# Altium PCB PCB2.PcbDoc (part 2 of 7)
Units mm, origin at the board's own origin, x right, y up, seen from the top; angles counter-clockwise.
Board outline 49 x 45 mm, 6 copper layers (Component Side, GND1, 3.3V, 1.2V, GND2, Solder Side), stack 1.629 mm thick; 56 components, 116 nets, 925 pads, 478 vias.
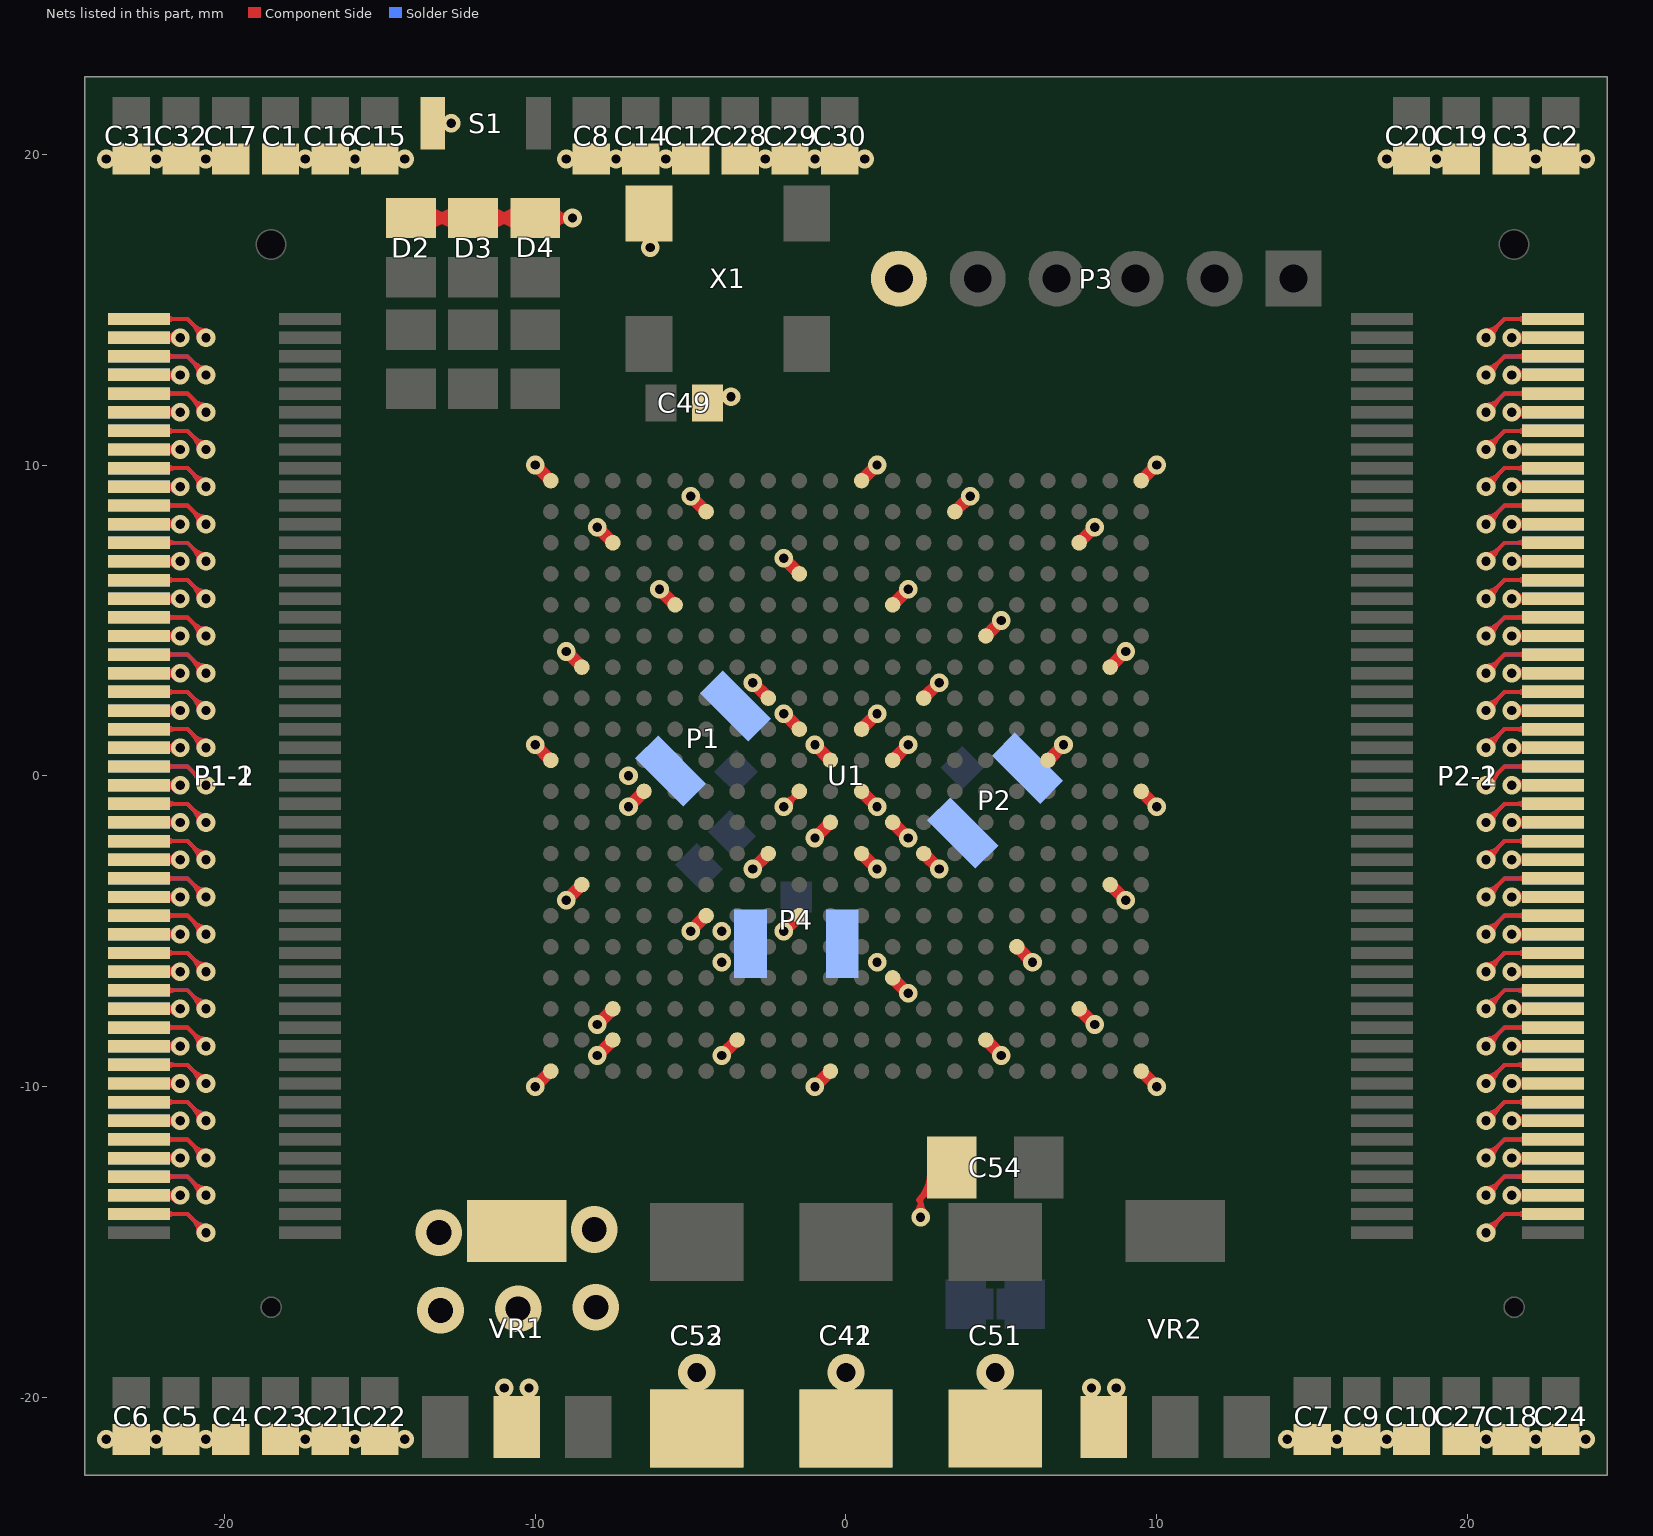
[diagram p6: the nets of this part, all layers, seen from the top]

## Via types
v1: diameter 0.6, hole 0.3, Component Side to Solder Side, tented both sides, 462 vias
v2: diameter 1.5, hole 0.8, Component Side to Solder Side, 10 vias
v3: diameter 1.2, hole 0.6, Component Side to Solder Side, 6 vias

## Nets (pads, with @x,y where several pads share a name; then routed paths per layer and width w, separated by ;. In a path a pad name is that pad's centre, name@x,y a point inside that pad or via, vN(x,y) a via of type N, cw(c..) or ccw(c..) an arc to the next point about the centre after c; other vN are vias at no path point) (continued)
GND: C1.1 C2.1 C3.1 C4.1 C5.1 C6.1 C7.1 C8.1 C9.1 C10.1 C12.1 C14.1 C15.1 C16.1 C17.1 C18.1 C19.1 C20.1 C21.1 C22.1 C23.1 C24.1 C27.1 C28.1 C29.1 C30.1 C31.1 C32.1 C41.2 C42.2 C49.1 C51.2 C52.2 C53.2 C54.2 D2.2 D3.2 D4.2 P1-1.1 P1-1.3 P1-1.5 P1-1.7 P1-1.9 P1-1.11 P1-1.13 P1-1.15 P1-1.17 P1-1.19 P1-1.21 P1-1.23 P1-1.25 P1-1.27 P1-1.29 P1-1.31 P1-1.33 P1-1.35 P1-1.37 P1-1.39 P1-1.41 P1-1.43 P1-1.45 P1-1.47 P1-1.49 P1-1.51 P1-1.53 P1-1.55 P1-1.57 P1-1.59 P1-1.61 P1-1.63 P1-1.65 P1-1.67 P1-1.69 P1-1.71 P1-1.73 P1-1.75 P1-1.77 P1-1.79 P1-1.81 P1-1.83 P1-1.85 P1-1.87 P1-1.89 P1-1.91 P1-1.93 P1-1.95 P1-1.97 P1-2.1 P1-2.3 P1-2.5 P1-2.7 P1-2.9 P1-2.11 P1-2.13 P1-2.15 P1-2.17 P1-2.19 P1-2.21 P1-2.23 P1-2.25 P1-2.27 P1-2.29 P1-2.31 P1-2.33 P1-2.35 P1-2.37 P1-2.39 P1-2.41 P1-2.43 P1-2.45 P1-2.47 P1-2.49 P1-2.51 P1-2.53 P1-2.55 P1-2.57 P1-2.59 P1-2.61 P1-2.63 P1-2.65 P1-2.67 P1-2.69 P1-2.71 P1-2.73 P1-2.75 P1-2.77 P1-2.79 P1-2.81 P1-2.83 P1-2.85 P1-2.87 P1-2.89 P1-2.91 P1-2.93 P1-2.95 P1-2.97 P1.2 P2-1.2 P2-1.4 P2-1.6 P2-1.8 P2-1.10 P2-1.12 P2-1.14 P2-1.16 P2-1.18 P2-1.20 P2-1.22 P2-1.24 P2-1.26 P2-1.28 P2-1.30 P2-1.32 P2-1.34 P2-1.36 P2-1.38 P2-1.40 P2-1.42 P2-1.44 P2-1.46 P2-1.48 P2-1.50 P2-1.52 P2-1.54 P2-1.56 P2-1.58 P2-1.60 P2-1.62 P2-1.64 P2-1.66 P2-1.68 P2-1.70 P2-1.72 P2-1.74 P2-1.76 P2-1.78 P2-1.80 P2-1.82 P2-1.84 P2-1.86 P2-1.88 P2-1.90 P2-1.92 P2-1.94 P2-1.96 P2-1.98 P2-2.2 P2-2.4 P2-2.6 P2-2.8 P2-2.10 P2-2.12 P2-2.14 P2-2.16 P2-2.18 P2-2.20 P2-2.22 P2-2.24 P2-2.26 P2-2.28 P2-2.30 P2-2.32 P2-2.34 P2-2.36 P2-2.38 P2-2.40 P2-2.42 P2-2.44 P2-2.46 P2-2.48 P2-2.50 P2-2.52 P2-2.54 P2-2.56 P2-2.58 P2-2.60 P2-2.62 P2-2.64 P2-2.66 P2-2.68 P2-2.70 P2-2.72 P2-2.74 P2-2.76 P2-2.78 P2-2.80 P2-2.82 P2-2.84 P2-2.86 P2-2.88 P2-2.90 P2-2.92 P2-2.94 P2-2.96 P2-2.98 P2.2 P3.6 P4.2 S1.1 U1.A1 U1.A11 U1.A20 U1.B6 U1.B14 U1.C3 U1.C18 U1.D9 U1.E5 U1.E12 U1.F15 U1.G2 U1.G19 U1.H8 U1.H13 U1.J9 U1.J11 U1.K1 U1.K10 U1.K12 U1.K17 U1.L4 U1.L9 U1.L11 U1.L20 U1.M10 U1.M12 U1.N8 U1.N11 U1.N13 U1.P2 U1.P19 U1.R6 U1.R9 U1.T16 U1.U12 U1.V3 U1.V18 U1.W3 U1.W7 U1.W15 U1.Y1 U1.Y10 U1.Y20 VR1.2 VR2.1 X1.2 | length 1056.3
  Component Side w0.127: P1-1.97@-22.75,-14.1 -21.196,-14.1 v1(-20.596,-14.7) ; P1-1.95@-22.75,-13.5 v1(-21.423,-13.5) v1@-21.323,-13.5 ; P1-1.93@-22.75,-12.9 -21.196,-12.9 v1(-20.596,-13.5) ; P1-1.91@-22.75,-12.3 v1(-21.423,-12.3) v1@-21.323,-12.3 ; P1-1.89@-22.75,-11.7 -21.196,-11.7 v1(-20.596,-12.3) ; P1-1.87@-22.75,-11.1 v1(-21.423,-11.1) v1@-21.323,-11.1 ; P1-1.85@-22.75,-10.5 -21.196,-10.5 v1(-20.596,-11.1) ; P1-1.83@-22.75,-9.9 v1(-21.423,-9.9) v1@-21.323,-9.9 ; P1-1.81@-22.75,-9.3 -21.196,-9.3 v1(-20.596,-9.9) ; P1-1.79@-22.75,-8.7 v1(-21.423,-8.7) v1@-21.323,-8.7 ; P1-1.77@-22.75,-8.1 -21.196,-8.1 v1(-20.596,-8.7) ; P1-1.75@-22.75,-7.5 v1(-21.423,-7.5) v1@-21.323,-7.5 ; P1-1.73@-22.75,-6.9 -21.196,-6.9 v1(-20.596,-7.5) ; P1-1.71@-22.75,-6.3 v1(-21.423,-6.3) v1@-21.323,-6.3 ; P1-1.69@-22.75,-5.7 -21.196,-5.7 v1(-20.596,-6.3) ; P1-1.67@-22.75,-5.1 v1(-21.423,-5.1) v1@-21.323,-5.1 ; P1-1.65@-22.75,-4.5 -21.196,-4.5 v1(-20.596,-5.1) ; P1-1.63@-22.75,-3.9 v1(-21.423,-3.9) v1@-21.323,-3.9 ; P1-1.61@-22.75,-3.3 -21.196,-3.3 v1(-20.596,-3.9) ; P1-1.59@-22.75,-2.7 v1(-21.423,-2.7) v1@-21.323,-2.7 ; P1-1.57@-22.75,-2.1 -21.196,-2.1 v1(-20.596,-2.7) ; P1-1.55@-22.75,-1.5 v1(-21.423,-1.5) v1@-21.323,-1.5 ; P1-1.53@-22.75,-0.9 -21.196,-0.9 v1(-20.596,-1.5) ; P1-1.51@-22.75,-0.3 v1(-21.423,-0.3) v1@-21.323,-0.3 ; P1-1.49@-22.75,0.3 -21.196,0.3 v1(-20.596,-0.3) ; P1-1.47@-22.75,0.9 v1(-21.423,0.9) v1@-21.323,0.9 ; P1-1.45@-22.75,1.5 -21.196,1.5 v1(-20.596,0.9) ; P1-1.43@-22.75,2.1 v1(-21.423,2.1) v1@-21.323,2.1 ; P1-1.41@-22.75,2.7 -21.196,2.7 v1(-20.596,2.1) ; P1-1.39@-22.75,3.3 v1(-21.423,3.3) v1@-21.323,3.3 ; P1-1.37@-22.75,3.9 -21.196,3.9 v1(-20.596,3.3) ; P1-1.35@-22.75,4.5 v1(-21.423,4.5) v1@-21.323,4.5 ; P1-1.33@-22.75,5.1 -21.196,5.1 v1(-20.596,4.5) ; P1-1.31@-22.75,5.7 v1(-21.423,5.7) v1@-21.323,5.7 ; P1-1.29@-22.75,6.3 -21.196,6.3 v1(-20.596,5.7) ; P1-1.27@-22.75,6.9 v1(-21.423,6.9) v1@-21.323,6.9 ; P1-1.25@-22.75,7.5 -21.196,7.5 v1(-20.596,6.9) ; P1-1.23@-22.75,8.1 v1(-21.423,8.1) v1@-21.323,8.1 ; P1-1.21@-22.75,8.7 -21.196,8.7 v1(-20.596,8.1) ; P1-1.19@-22.75,9.3 v1(-21.423,9.3) v1@-21.323,9.3 ; P1-1.17@-22.75,9.9 -21.196,9.9 v1(-20.596,9.3) ; P1-1.15@-22.75,10.5 v1(-21.423,10.5) v1@-21.323,10.5 ; P1-1.13@-22.75,11.1 -21.196,11.1 v1(-20.596,10.5) ; P1-1.11@-22.75,11.7 v1(-21.423,11.7) v1@-21.323,11.7 ; P1-1.9@-22.75,12.3 -21.196,12.3 v1(-20.596,11.7) ; P1-1.7@-22.75,12.9 v1(-21.423,12.9) v1@-21.323,12.9 ; P1-1.5@-22.75,13.5 -21.196,13.5 v1(-20.596,12.9) ; P1-1.3@-22.75,14.1 v1(-21.423,14.1) v1@-21.323,14.1 ; P1-1.1@-22.75,14.7 -21.196,14.7 v1(-20.596,14.1) ; v1(-2,-1) U1.L9@-1.5,-0.5 ; v1(20.596,-14.7) 21.196,-14.1 P2-1.98@22.75,-14.1 ; v1(20.596,-13.5) 21.196,-12.9 P2-1.94@22.75,-12.9 ; v1(20.596,-12.3) 21.196,-11.7 P2-1.90@22.75,-11.7 ; v1(20.596,-11.1) 21.196,-10.5 P2-1.86@22.75,-10.5 ; v1(20.596,-9.9) 21.196,-9.3 P2-1.82@22.75,-9.3 ; v1(20.596,-8.7) 21.196,-8.1 P2-1.78@22.75,-8.1 ; v1(20.596,-7.5) 21.196,-6.9 P2-1.74@22.75,-6.9 ; v1(20.596,-6.3) 21.196,-5.7 P2-1.70@22.75,-5.7 ; v1(20.596,-5.1) 21.196,-4.5 P2-1.66@22.75,-4.5 ; v1(20.596,-3.9) 21.196,-3.3 P2-1.62@22.75,-3.3 ; v1(20.596,-2.7) 21.196,-2.1 P2-1.58@22.75,-2.1 ; v1(20.596,-1.5) 21.196,-0.9 P2-1.54@22.75,-0.9 ; v1(20.596,-0.3) 21.196,0.3 P2-1.50@22.75,0.3 ; v1(20.596,0.9) 21.196,1.5 P2-1.46@22.75,1.5 ; v1(20.596,2.1) 21.196,2.7 P2-1.42@22.75,2.7 ; v1(20.596,3.3) 21.196,3.9 P2-1.38@22.75,3.9 ; v1(20.596,4.5) 21.196,5.1 P2-1.34@22.75,5.1 ; v1(20.596,5.7) 21.196,6.3 P2-1.30@22.75,6.3 ; v1(20.596,6.9) 21.196,7.5 P2-1.26@22.75,7.5 ; v1(20.596,8.1) 21.196,8.7 P2-1.22@22.75,8.7 ; v1(20.596,9.3) 21.196,9.9 P2-1.18@22.75,9.9 ; v1(20.596,10.5) 21.196,11.1 P2-1.14@22.75,11.1 ; v1(20.596,11.7) 21.196,12.3 P2-1.10@22.75,12.3 ; v1(20.596,12.9) 21.196,13.5 P2-1.6@22.75,13.5 ; v1(20.596,14.1) 21.196,14.7 P2-1.2@22.75,14.7 ; v1@21.323,-13.5 v1(21.423,-13.5) P2-1.96@22.75,-13.5 ; v1@21.323,-12.3 v1(21.423,-12.3) P2-1.92@22.75,-12.3 ; v1@21.323,-11.1 v1(21.423,-11.1) P2-1.88@22.75,-11.1 ; v1@21.323,-9.9 v1(21.423,-9.9) P2-1.84@22.75,-9.9 ; v1@21.323,-8.7 v1(21.423,-8.7) P2-1.80@22.75,-8.7 ; v1@21.323,-7.5 v1(21.423,-7.5) P2-1.76@22.75,-7.5 ; v1@21.323,-6.3 v1(21.423,-6.3) P2-1.72@22.75,-6.3 ; v1@21.323,-5.1 v1(21.423,-5.1) P2-1.68@22.75,-5.1 ; v1@21.323,-3.9 v1(21.423,-3.9) P2-1.64@22.75,-3.9 ; v1@21.323,-2.7 v1(21.423,-2.7) P2-1.60@22.75,-2.7 ; v1@21.323,-1.5 v1(21.423,-1.5) P2-1.56@22.75,-1.5 ; v1@21.323,-0.3 v1(21.423,-0.3) P2-1.52@22.75,-0.3 ; v1@21.323,0.9 v1(21.423,0.9) P2-1.48@22.75,0.9 ; v1@21.323,2.1 v1(21.423,2.1) P2-1.44@22.75,2.1 ; v1@21.323,3.3 v1(21.423,3.3) P2-1.40@22.75,3.3 ; v1@21.323,4.5 v1(21.423,4.5) P2-1.36@22.75,4.5 ; v1@21.323,5.7 v1(21.423,5.7) P2-1.32@22.75,5.7 ; v1@21.323,6.9 v1(21.423,6.9) P2-1.28@22.75,6.9 ; v1@21.323,8.1 v1(21.423,8.1) P2-1.24@22.75,8.1 ; v1@21.323,9.3 v1(21.423,9.3) P2-1.20@22.75,9.3 ; v1@21.323,10.5 v1(21.423,10.5) P2-1.16@22.75,10.5 ; v1@21.323,11.7 v1(21.423,11.7) P2-1.12@22.75,11.7 ; v1(21.423,12.9) P2-1.8@22.75,12.9 ; v1(21.423,14.1) P2-1.4@22.75,14.1 ; P1-1.95@-21.994,-13.5 ccw(c-21.994,-12.929) -21.59,-13.333 cw(c-21.994,-12.929) P1-1.95@-21.994,-13.5 ; P1-1.95@-21.994,-13.5 cw(c-21.994,-14.071) -21.59,-13.667 ccw(c-21.994,-14.071) P1-1.95@-21.994,-13.5 ; P1-1.91@-21.994,-12.3 ccw(c-21.994,-11.729) -21.59,-12.133 cw(c-21.994,-11.729) P1-1.91@-21.994,-12.3 ; P1-1.91@-21.994,-12.3 cw(c-21.994,-12.871) -21.59,-12.467 ccw(c-21.994,-12.871) P1-1.91@-21.994,-12.3 ; P1-1.87@-21.994,-11.1 ccw(c-21.994,-10.529) -21.59,-10.933 cw(c-21.994,-10.529) P1-1.87@-21.994,-11.1 ; P1-1.87@-21.994,-11.1 cw(c-21.994,-11.671) -21.59,-11.267 ccw(c-21.994,-11.671) P1-1.87@-21.994,-11.1 ; P1-1.83@-21.994,-9.9 ccw(c-21.994,-9.329) -21.59,-9.733 cw(c-21.994,-9.329) P1-1.83@-21.994,-9.9 ; P1-1.83@-21.994,-9.9 cw(c-21.994,-10.471) -21.59,-10.067 ccw(c-21.994,-10.471) P1-1.83@-21.994,-9.9 ; P1-1.79@-21.994,-8.7 ccw(c-21.994,-8.129) -21.59,-8.533 cw(c-21.994,-8.129) P1-1.79@-21.994,-8.7 ; P1-1.79@-21.994,-8.7 cw(c-21.994,-9.271) -21.59,-8.867 ccw(c-21.994,-9.271) P1-1.79@-21.994,-8.7 ; P1-1.75@-21.994,-7.5 ccw(c-21.994,-6.929) -21.59,-7.333 cw(c-21.994,-6.929) P1-1.75@-21.994,-7.5 ; P1-1.75@-21.994,-7.5 cw(c-21.994,-8.071) -21.59,-7.667 ccw(c-21.994,-8.071) P1-1.75@-21.994,-7.5 ; P1-1.71@-21.994,-6.3 ccw(c-21.994,-5.729) -21.59,-6.133 cw(c-21.994,-5.729) P1-1.71@-21.994,-6.3 ; P1-1.71@-21.994,-6.3 cw(c-21.994,-6.871) -21.59,-6.467 ccw(c-21.994,-6.871) P1-1.71@-21.994,-6.3 ; P1-1.67@-21.994,-5.1 ccw(c-21.994,-4.529) -21.59,-4.933 cw(c-21.994,-4.529) P1-1.67@-21.994,-5.1 ; P1-1.67@-21.994,-5.1 cw(c-21.994,-5.671) -21.59,-5.267 ccw(c-21.994,-5.671) P1-1.67@-21.994,-5.1 ; P1-1.63@-21.994,-3.9 ccw(c-21.994,-3.329) -21.59,-3.733 cw(c-21.994,-3.329) P1-1.63@-21.994,-3.9 ; P1-1.63@-21.994,-3.9 cw(c-21.994,-4.471) -21.59,-4.067 ccw(c-21.994,-4.471) P1-1.63@-21.994,-3.9 ; P1-1.59@-21.994,-2.7 ccw(c-21.994,-2.129) -21.59,-2.533 cw(c-21.994,-2.129) P1-1.59@-21.994,-2.7 ; P1-1.59@-21.994,-2.7 cw(c-21.994,-3.271) -21.59,-2.867 ccw(c-21.994,-3.271) P1-1.59@-21.994,-2.7 ; P1-1.55@-21.994,-1.5 ccw(c-21.994,-0.929) -21.59,-1.333 cw(c-21.994,-0.929) P1-1.55@-21.994,-1.5 ; P1-1.55@-21.994,-1.5 cw(c-21.994,-2.071) -21.59,-1.667 ccw(c-21.994,-2.071) P1-1.55@-21.994,-1.5 ; P1-1.51@-21.994,-0.3 ccw(c-21.994,0.271) -21.59,-0.133 cw(c-21.994,0.271) P1-1.51@-21.994,-0.3 ; P1-1.51@-21.994,-0.3 cw(c-21.994,-0.871) -21.59,-0.467 ccw(c-21.994,-0.871) P1-1.51@-21.994,-0.3 ; P1-1.47@-21.994,0.9 ccw(c-21.994,1.471) -21.59,1.067 cw(c-21.994,1.471) P1-1.47@-21.994,0.9 ; P1-1.47@-21.994,0.9 cw(c-21.994,0.329) -21.59,0.733 ccw(c-21.994,0.329) P1-1.47@-21.994,0.9 ; P1-1.43@-21.994,2.1 ccw(c-21.994,2.671) -21.59,2.267 cw(c-21.994,2.671) P1-1.43@-21.994,2.1 ; P1-1.43@-21.994,2.1 cw(c-21.994,1.529) -21.59,1.933 ccw(c-21.994,1.529) P1-1.43@-21.994,2.1 ; P1-1.39@-21.994,3.3 ccw(c-21.994,3.871) -21.59,3.467 cw(c-21.994,3.871) P1-1.39@-21.994,3.3 ; P1-1.39@-21.994,3.3 cw(c-21.994,2.729) -21.59,3.133 ccw(c-21.994,2.729) P1-1.39@-21.994,3.3 ; P1-1.35@-21.994,4.5 ccw(c-21.994,5.071) -21.59,4.667 cw(c-21.994,5.071) P1-1.35@-21.994,4.5 ; P1-1.35@-21.994,4.5 cw(c-21.994,3.929) -21.59,4.333 ccw(c-21.994,3.929) P1-1.35@-21.994,4.5 ; P1-1.31@-21.994,5.7 ccw(c-21.994,6.271) -21.59,5.867 cw(c-21.994,6.271) P1-1.31@-21.994,5.7 ; P1-1.31@-21.994,5.7 cw(c-21.994,5.129) -21.59,5.533 ccw(c-21.994,5.129) P1-1.31@-21.994,5.7 ; P1-1.27@-21.994,6.9 ccw(c-21.994,7.471) -21.59,7.067 cw(c-21.994,7.471) P1-1.27@-21.994,6.9 ; P1-1.27@-21.994,6.9 cw(c-21.994,6.329) -21.59,6.733 ccw(c-21.994,6.329) P1-1.27@-21.994,6.9 ; P1-1.23@-21.994,8.1 ccw(c-21.994,8.671) -21.59,8.267 cw(c-21.994,8.671) P1-1.23@-21.994,8.1 ; P1-1.23@-21.994,8.1 cw(c-21.994,7.529) -21.59,7.933 ccw(c-21.994,7.529) P1-1.23@-21.994,8.1 ; P1-1.19@-21.994,9.3 ccw(c-21.994,9.871) -21.59,9.467 cw(c-21.994,9.871) P1-1.19@-21.994,9.3 ; P1-1.19@-21.994,9.3 cw(c-21.994,8.729) -21.59,9.133 ccw(c-21.994,8.729) P1-1.19@-21.994,9.3 ; P1-1.15@-21.994,10.5 ccw(c-21.994,11.071) -21.59,10.667 cw(c-21.994,11.071) P1-1.15@-21.994,10.5 ; P1-1.15@-21.994,10.5 cw(c-21.994,9.929) -21.59,10.333 ccw(c-21.994,9.929) P1-1.15@-21.994,10.5 ; P1-1.11@-21.994,11.7 ccw(c-21.994,12.271) -21.59,11.867 cw(c-21.994,12.271) P1-1.11@-21.994,11.7 ; P1-1.11@-21.994,11.7 cw(c-21.994,11.129) -21.59,11.533 ccw(c-21.994,11.129) P1-1.11@-21.994,11.7 ; P1-1.7@-21.994,12.9 ccw(c-21.994,13.471) -21.59,13.067 cw(c-21.994,13.471) P1-1.7@-21.994,12.9 ; P1-1.7@-21.994,12.9 cw(c-21.994,12.329) -21.59,12.733 ccw(c-21.994,12.329) P1-1.7@-21.994,12.9 ; P1-1.3@-21.994,14.1 ccw(c-21.994,14.671) -21.59,14.267 cw(c-21.994,14.671) P1-1.3@-21.994,14.1 ; P1-1.3@-21.994,14.1 cw(c-21.994,13.529) -21.59,13.933 ccw(c-21.994,13.529) P1-1.3@-21.994,14.1 ; -21.62,-14.1 ccw(c-21.62,-14.43) -21.853,-14.197 cw(c-21.62,-14.43) -21.62,-14.1 ; -21.62,-14.1 cw(c-21.62,-13.77) -21.853,-14.003 ccw(c-21.62,-13.77) -21.62,-14.1 ; v1@-21.62,-13.5 ccw(c-21.62,-13.83) -21.853,-13.597 cw(c-21.62,-13.83) v1@-21.62,-13.5 ; v1@-21.62,-13.5 cw(c-21.62,-13.17) -21.853,-13.403 ccw(c-21.62,-13.17) v1@-21.62,-13.5 ; -21.62,-12.9 ccw(c-21.62,-13.23) -21.853,-12.997 cw(c-21.62,-13.23) -21.62,-12.9 ; -21.62,-12.9 cw(c-21.62,-12.57) -21.853,-12.803 ccw(c-21.62,-12.57) -21.62,-12.9 ; v1@-21.62,-12.3 ccw(c-21.62,-12.63) -21.853,-12.397 cw(c-21.62,-12.63) v1@-21.62,-12.3 ; v1@-21.62,-12.3 cw(c-21.62,-11.97) -21.853,-12.203 ccw(c-21.62,-11.97) v1@-21.62,-12.3 ; -21.62,-11.7 ccw(c-21.62,-12.03) -21.853,-11.797 cw(c-21.62,-12.03) -21.62,-11.7 ; -21.62,-11.7 cw(c-21.62,-11.37) -21.853,-11.603 ccw(c-21.62,-11.37) -21.62,-11.7 ; v1@-21.62,-11.1 ccw(c-21.62,-11.43) -21.853,-11.197 cw(c-21.62,-11.43) v1@-21.62,-11.1 ; v1@-21.62,-11.1 cw(c-21.62,-10.77) -21.853,-11.003 ccw(c-21.62,-10.77) v1@-21.62,-11.1 ; -21.62,-10.5 ccw(c-21.62,-10.83) -21.853,-10.597 cw(c-21.62,-10.83) -21.62,-10.5 ; -21.62,-10.5 cw(c-21.62,-10.17) -21.853,-10.403 ccw(c-21.62,-10.17) -21.62,-10.5 ; v1@-21.62,-9.9 ccw(c-21.62,-10.23) -21.853,-9.997 cw(c-21.62,-10.23) v1@-21.62,-9.9 ; v1@-21.62,-9.9 cw(c-21.62,-9.57) -21.853,-9.803 ccw(c-21.62,-9.57) v1@-21.62,-9.9 ; -21.62,-9.3 ccw(c-21.62,-9.63) -21.853,-9.397 cw(c-21.62,-9.63) -21.62,-9.3 ; -21.62,-9.3 cw(c-21.62,-8.97) -21.853,-9.203 ccw(c-21.62,-8.97) -21.62,-9.3 ; v1@-21.62,-8.7 ccw(c-21.62,-9.03) -21.853,-8.797 cw(c-21.62,-9.03) v1@-21.62,-8.7 ; v1@-21.62,-8.7 cw(c-21.62,-8.37) -21.853,-8.603 ccw(c-21.62,-8.37) v1@-21.62,-8.7 ; -21.62,-8.1 ccw(c-21.62,-8.43) -21.853,-8.197 cw(c-21.62,-8.43) -21.62,-8.1 ; -21.62,-8.1 cw(c-21.62,-7.77) -21.853,-8.003 ccw(c-21.62,-7.77) -21.62,-8.1 ; v1@-21.62,-7.5 ccw(c-21.62,-7.83) -21.853,-7.597 cw(c-21.62,-7.83) v1@-21.62,-7.5 ; v1@-21.62,-7.5 cw(c-21.62,-7.17) -21.853,-7.403 ccw(c-21.62,-7.17) v1@-21.62,-7.5 ; -21.62,-6.9 ccw(c-21.62,-7.23) -21.853,-6.997 cw(c-21.62,-7.23) -21.62,-6.9 ; -21.62,-6.9 cw(c-21.62,-6.57) -21.853,-6.803 ccw(c-21.62,-6.57) -21.62,-6.9 ; v1@-21.62,-6.3 ccw(c-21.62,-6.63) -21.853,-6.397 cw(c-21.62,-6.63) v1@-21.62,-6.3 ; v1@-21.62,-6.3 cw(c-21.62,-5.97) -21.853,-6.203 ccw(c-21.62,-5.97) v1@-21.62,-6.3 ; -21.62,-5.7 ccw(c-21.62,-6.03) -21.853,-5.797 cw(c-21.62,-6.03) -21.62,-5.7 ; -21.62,-5.7 cw(c-21.62,-5.37) -21.853,-5.603 ccw(c-21.62,-5.37) -21.62,-5.7 ; v1@-21.62,-5.1 ccw(c-21.62,-5.43) -21.853,-5.197 cw(c-21.62,-5.43) v1@-21.62,-5.1 ; v1@-21.62,-5.1 cw(c-21.62,-4.77) -21.853,-5.003 ccw(c-21.62,-4.77) v1@-21.62,-5.1 ; -21.62,-4.5 ccw(c-21.62,-4.83) -21.853,-4.597 cw(c-21.62,-4.83) -21.62,-4.5 ; -21.62,-4.5 cw(c-21.62,-4.17) -21.853,-4.403 ccw(c-21.62,-4.17) -21.62,-4.5 ; v1@-21.62,-3.9 ccw(c-21.62,-4.23) -21.853,-3.997 cw(c-21.62,-4.23) v1@-21.62,-3.9 ; v1@-21.62,-3.9 cw(c-21.62,-3.57) -21.853,-3.803 ccw(c-21.62,-3.57) v1@-21.62,-3.9 ; -21.62,-3.3 ccw(c-21.62,-3.63) -21.853,-3.397 cw(c-21.62,-3.63) -21.62,-3.3 ; -21.62,-3.3 cw(c-21.62,-2.97) -21.853,-3.203 ccw(c-21.62,-2.97) -21.62,-3.3 ; v1@-21.62,-2.7 ccw(c-21.62,-3.03) -21.853,-2.797 cw(c-21.62,-3.03) v1@-21.62,-2.7 ; v1@-21.62,-2.7 cw(c-21.62,-2.37) -21.853,-2.603 ccw(c-21.62,-2.37) v1@-21.62,-2.7 ; -21.62,-2.1 ccw(c-21.62,-2.43) -21.853,-2.197 cw(c-21.62,-2.43) -21.62,-2.1 ; -21.62,-2.1 cw(c-21.62,-1.77) -21.853,-2.003 ccw(c-21.62,-1.77) -21.62,-2.1 ; v1@-21.62,-1.5 ccw(c-21.62,-1.83) -21.853,-1.597 cw(c-21.62,-1.83) v1@-21.62,-1.5 ; v1@-21.62,-1.5 cw(c-21.62,-1.17) -21.853,-1.403 ccw(c-21.62,-1.17) v1@-21.62,-1.5 ; -21.62,-0.9 ccw(c-21.62,-1.23) -21.853,-0.997 cw(c-21.62,-1.23) -21.62,-0.9 ; -21.62,-0.9 cw(c-21.62,-0.57) -21.853,-0.803 ccw(c-21.62,-0.57) -21.62,-0.9 ; v1@-21.62,-0.3 ccw(c-21.62,-0.63) -21.853,-0.397 cw(c-21.62,-0.63) v1@-21.62,-0.3 ; v1@-21.62,-0.3 cw(c-21.62,0.03) -21.853,-0.203 ccw(c-21.62,0.03) v1@-21.62,-0.3 ; -21.62,0.3 ccw(c-21.62,-0.03) -21.853,0.203 cw(c-21.62,-0.03) -21.62,0.3 ; -21.62,0.3 cw(c-21.62,0.63) -21.853,0.397 ccw(c-21.62,0.63) -21.62,0.3 ; v1@-21.62,0.9 ccw(c-21.62,0.57) -21.853,0.803 cw(c-21.62,0.57) v1@-21.62,0.9 ; v1@-21.62,0.9 cw(c-21.62,1.23) -21.853,0.997 ccw(c-21.62,1.23) v1@-21.62,0.9 ; -21.62,1.5 ccw(c-21.62,1.17) -21.853,1.403 cw(c-21.62,1.17) -21.62,1.5 ; -21.62,1.5 cw(c-21.62,1.83) -21.853,1.597 ccw(c-21.62,1.83) -21.62,1.5 ; v1@-21.62,2.1 ccw(c-21.62,1.77) -21.853,2.003 cw(c-21.62,1.77) v1@-21.62,2.1 ; v1@-21.62,2.1 cw(c-21.62,2.43) -21.853,2.197 ccw(c-21.62,2.43) v1@-21.62,2.1 ; -21.62,2.7 ccw(c-21.62,2.37) -21.853,2.603 cw(c-21.62,2.37) -21.62,2.7 ; -21.62,2.7 cw(c-21.62,3.03) -21.853,2.797 ccw(c-21.62,3.03) -21.62,2.7 ; v1@-21.62,3.3 ccw(c-21.62,2.97) -21.853,3.203 cw(c-21.62,2.97) v1@-21.62,3.3 ; v1@-21.62,3.3 cw(c-21.62,3.63) -21.853,3.397 ccw(c-21.62,3.63) v1@-21.62,3.3 ; -21.62,3.9 ccw(c-21.62,3.57) -21.853,3.803 cw(c-21.62,3.57) -21.62,3.9 ; -21.62,3.9 cw(c-21.62,4.23) -21.853,3.997 ccw(c-21.62,4.23) -21.62,3.9 ; v1@-21.62,4.5 ccw(c-21.62,4.17) -21.853,4.403 cw(c-21.62,4.17) v1@-21.62,4.5 ; v1@-21.62,4.5 cw(c-21.62,4.83) -21.853,4.597 ccw(c-21.62,4.83) v1@-21.62,4.5 ; -21.62,5.1 ccw(c-21.62,4.77) -21.853,5.003 cw(c-21.62,4.77) -21.62,5.1 ; -21.62,5.1 cw(c-21.62,5.43) -21.853,5.197 ccw(c-21.62,5.43) -21.62,5.1 ; v1@-21.62,5.7 ccw(c-21.62,5.37) -21.853,5.603 cw(c-21.62,5.37) v1@-21.62,5.7 ; v1@-21.62,5.7 cw(c-21.62,6.03) -21.853,5.797 ccw(c-21.62,6.03) v1@-21.62,5.7 ; -21.62,6.3 ccw(c-21.62,5.97) -21.853,6.203 cw(c-21.62,5.97) -21.62,6.3 ; -21.62,6.3 cw(c-21.62,6.63) -21.853,6.397 ccw(c-21.62,6.63) -21.62,6.3 ; v1@-21.62,6.9 ccw(c-21.62,6.57) -21.853,6.803 cw(c-21.62,6.57) v1@-21.62,6.9 ; v1@-21.62,6.9 cw(c-21.62,7.23) -21.853,6.997 ccw(c-21.62,7.23) v1@-21.62,6.9 ; -21.62,7.5 ccw(c-21.62,7.17) -21.853,7.403 cw(c-21.62,7.17) -21.62,7.5 ; -21.62,7.5 cw(c-21.62,7.83) -21.853,7.597 ccw(c-21.62,7.83) -21.62,7.5 ; v1@-21.62,8.1 ccw(c-21.62,7.77) -21.853,8.003 cw(c-21.62,7.77) v1@-21.62,8.1 ; v1@-21.62,8.1 cw(c-21.62,8.43) -21.853,8.197 ccw(c-21.62,8.43) v1@-21.62,8.1 ; -21.62,8.7 ccw(c-21.62,8.37) -21.853,8.603 cw(c-21.62,8.37) -21.62,8.7 ; -21.62,8.7 cw(c-21.62,9.03) -21.853,8.797 ccw(c-21.62,9.03) -21.62,8.7 ; v1@-21.62,9.3 ccw(c-21.62,8.97) -21.853,9.203 cw(c-21.62,8.97) v1@-21.62,9.3 ; v1@-21.62,9.3 cw(c-21.62,9.63) -21.853,9.397 ccw(c-21.62,9.63) v1@-21.62,9.3 ; -21.62,9.9 ccw(c-21.62,9.57) -21.853,9.803 cw(c-21.62,9.57) -21.62,9.9 ; -21.62,9.9 cw(c-21.62,10.23) -21.853,9.997 ccw(c-21.62,10.23) -21.62,9.9 ; v1@-21.62,10.5 ccw(c-21.62,10.17) -21.853,10.403 cw(c-21.62,10.17) v1@-21.62,10.5 ; v1@-21.62,10.5 cw(c-21.62,10.83) -21.853,10.597 ccw(c-21.62,10.83) v1@-21.62,10.5 ; -21.62,11.1 ccw(c-21.62,10.77) -21.853,11.003 cw(c-21.62,10.77) -21.62,11.1 ; -21.62,11.1 cw(c-21.62,11.43) -21.853,11.197 ccw(c-21.62,11.43) -21.62,11.1 ; v1@-21.62,11.7 ccw(c-21.62,11.37) -21.853,11.603 cw(c-21.62,11.37) v1@-21.62,11.7 ; v1@-21.62,11.7 cw(c-21.62,12.03) -21.853,11.797 ccw(c-21.62,12.03) v1@-21.62,11.7 ; -21.62,12.3 ccw(c-21.62,11.97) -21.853,12.203 cw(c-21.62,11.97) -21.62,12.3 ; -21.62,12.3 cw(c-21.62,12.63) -21.853,12.397 ccw(c-21.62,12.63) -21.62,12.3 ; v1@-21.62,12.9 ccw(c-21.62,12.57) -21.853,12.803 cw(c-21.62,12.57) v1@-21.62,12.9 ; v1@-21.62,12.9 cw(c-21.62,13.23) -21.853,12.997 ccw(c-21.62,13.23) v1@-21.62,12.9 ; -21.62,13.5 ccw(c-21.62,13.17) -21.853,13.403 cw(c-21.62,13.17) -21.62,13.5 ; -21.62,13.5 cw(c-21.62,13.83) -21.853,13.597 ccw(c-21.62,13.83) -21.62,13.5 ; v1@-21.62,14.1 ccw(c-21.62,13.77) -21.853,14.003 cw(c-21.62,13.77) v1@-21.62,14.1 ; v1@-21.62,14.1 cw(c-21.62,14.43) -21.853,14.197 ccw(c-21.62,14.43) v1@-21.62,14.1 ; -21.62,14.7 ccw(c-21.62,14.37) -21.853,14.603 cw(c-21.62,14.37) -21.62,14.7 ; -21.62,14.7 cw(c-21.62,15.03) -21.853,14.797 ccw(c-21.62,15.03) -21.62,14.7 ; -21,-14.296 ccw(c-20.596,-13.893) -20.596,-14.464 cw(c-20.596,-13.893) -21,-14.296 ; -21,-14.296 cw(c-21.403,-14.7) -20.833,-14.7 ccw(c-21.403,-14.7) -21,-14.296 ; -21,-13.096 ccw(c-20.596,-12.693) -20.596,-13.264 cw(c-20.596,-12.693) -21,-13.096 ; -21,-13.096 cw(c-21.403,-13.5) -20.833,-13.5 ccw(c-21.403,-13.5) -21,-13.096 ; -21,-11.896 ccw(c-20.596,-11.493) -20.596,-12.064 cw(c-20.596,-11.493) -21,-11.896 ; -21,-11.896 cw(c-21.403,-12.3) -20.833,-12.3 ccw(c-21.403,-12.3) -21,-11.896 ; -21,-10.696 ccw(c-20.596,-10.293) -20.596,-10.864 cw(c-20.596,-10.293) -21,-10.696 ; -21,-10.696 cw(c-21.403,-11.1) -20.833,-11.1 ccw(c-21.403,-11.1) -21,-10.696 ; -21,-9.496 ccw(c-20.596,-9.093) -20.596,-9.664 cw(c-20.596,-9.093) -21,-9.496 ; -21,-9.496 cw(c-21.403,-9.9) -20.833,-9.9 ccw(c-21.403,-9.9) -21,-9.496 ; -21,-8.296 ccw(c-20.596,-7.893) -20.596,-8.464 cw(c-20.596,-7.893) -21,-8.296 ; -21,-8.296 cw(c-21.403,-8.7) -20.833,-8.7 ccw(c-21.403,-8.7) -21,-8.296 ; -21,-7.096 ccw(c-20.596,-6.693) -20.596,-7.264 cw(c-20.596,-6.693) -21,-7.096 ; -21,-7.096 cw(c-21.403,-7.5) -20.833,-7.5 ccw(c-21.403,-7.5) -21,-7.096 ; -21,-5.896 ccw(c-20.596,-5.493) -20.596,-6.064 cw(c-20.596,-5.493) -21,-5.896 ; -21,-5.896 cw(c-21.403,-6.3) -20.833,-6.3 ccw(c-21.403,-6.3) -21,-5.896 ; -21,-4.696 ccw(c-20.596,-4.293) -20.596,-4.864 cw(c-20.596,-4.293) -21,-4.696 ; -21,-4.696 cw(c-21.403,-5.1) -20.833,-5.1 ccw(c-21.403,-5.1) -21,-4.696 ; -21,-3.496 ccw(c-20.596,-3.093) -20.596,-3.664 cw(c-20.596,-3.093) -21,-3.496 ; -21,-3.496 cw(c-21.403,-3.9) -20.833,-3.9 ccw(c-21.403,-3.9) -21,-3.496 ; -21,-2.296 ccw(c-20.596,-1.893) -20.596,-2.464 cw(c-20.596,-1.893) -21,-2.296 ; -21,-2.296 cw(c-21.403,-2.7) -20.833,-2.7 ccw(c-21.403,-2.7) -21,-2.296 ; -21,-1.096 ccw(c-20.596,-0.693) -20.596,-1.264 cw(c-20.596,-0.693) -21,-1.096 ; -21,-1.096 cw(c-21.403,-1.5) -20.833,-1.5 ccw(c-21.403,-1.5) -21,-1.096 ; -21,0.104 ccw(c-20.596,0.507) -20.596,-0.064 cw(c-20.596,0.507) -21,0.104 ; -21,0.104 cw(c-21.403,-0.3) -20.833,-0.3 ccw(c-21.403,-0.3) -21,0.104 ; -21,1.304 ccw(c-20.596,1.707) -20.596,1.136 cw(c-20.596,1.707) -21,1.304 ; -21,1.304 cw(c-21.403,0.9) -20.833,0.9 ccw(c-21.403,0.9) -21,1.304 ; -21,2.504 ccw(c-20.596,2.907) -20.596,2.336 cw(c-20.596,2.907) -21,2.504 ; -21,2.504 cw(c-21.403,2.1) -20.833,2.1 ccw(c-21.403,2.1) -21,2.504 ; -21,3.704 ccw(c-20.596,4.107) -20.596,3.536 cw(c-20.596,4.107) -21,3.704 ; -21,3.704 cw(c-21.403,3.3) -20.833,3.3 ccw(c-21.403,3.3) -21,3.704 ; -21,4.904 ccw(c-20.596,5.307) -20.596,4.736 cw(c-20.596,5.307) -21,4.904 ; -21,4.904 cw(c-21.403,4.5) -20.833,4.5 ccw(c-21.403,4.5) -21,4.904 ; -21,6.104 ccw(c-20.596,6.507) -20.596,5.936 cw(c-20.596,6.507) -21,6.104 ; -21,6.104 cw(c-21.403,5.7) -20.833,5.7 ccw(c-21.403,5.7) -21,6.104 ; -21,7.304 ccw(c-20.596,7.707) -20.596,7.136 cw(c-20.596,7.707) -21,7.304 ; -21,7.304 cw(c-21.403,6.9) -20.833,6.9 ccw(c-21.403,6.9) -21,7.304 ; -21,8.504 ccw(c-20.596,8.907) -20.596,8.336 cw(c-20.596,8.907) -21,8.504 ; -21,8.504 cw(c-21.403,8.1) -20.833,8.1 ccw(c-21.403,8.1) -21,8.504 ; -21,9.704 ccw(c-20.596,10.107) -20.596,9.536 cw(c-20.596,10.107) -21,9.704 ; -21,9.704 cw(c-21.403,9.3) -20.833,9.3 ccw(c-21.403,9.3) -21,9.704 ; -21,10.904 ccw(c-20.596,11.307) -20.596,10.736 cw(c-20.596,11.307) -21,10.904 ; -21,10.904 cw(c-21.403,10.5) -20.833,10.5 ccw(c-21.403,10.5) -21,10.904 ; -21,12.104 ccw(c-20.596,12.507) -20.596,11.936 cw(c-20.596,12.507) -21,12.104 ; -21,12.104 cw(c-21.403,11.7) -20.833,11.7 ccw(c-21.403,11.7) -21,12.104 ; -21,13.304 ccw(c-20.596,13.707) -20.596,13.136 cw(c-20.596,13.707) -21,13.304 ; -21,13.304 cw(c-21.403,12.9) -20.833,12.9 ccw(c-21.403,12.9) -21,13.304 ; -21,14.504 ccw(c-20.596,14.907) -20.596,14.336 cw(c-20.596,14.907) -21,14.504 ; -21,14.504 cw(c-21.403,14.1) -20.833,14.1 ccw(c-21.403,14.1) -21,14.504 ; v1@-1.818,-0.818 ccw(c-2.137,-0.5) -1.687,-0.5 cw(c-2.137,-0.5) v1@-1.818,-0.818 ; v1@-1.818,-0.818 cw(c-1.5,-1.137) -1.5,-0.686 ccw(c-1.5,-1.137) v1@-1.818,-0.818 ; U1.L9@-1.596,-0.596 ccw(c-1.193,-1) -1.764,-1 cw(c-1.193,-1) U1.L9@-1.596,-0.596 ; U1.L9@-1.596,-0.596 cw(c-2,-0.193) -2,-0.764 ccw(c-2,-0.193) U1.L9@-1.596,-0.596 ; 21,-14.296 ccw(c21.403,-14.7) 20.833,-14.7 cw(c21.403,-14.7) 21,-14.296 ; 21,-14.296 cw(c20.596,-13.893) 20.596,-14.464 ccw(c20.596,-13.893) 21,-14.296 ; 21,-13.096 ccw(c21.403,-13.5) 20.833,-13.5 cw(c21.403,-13.5) 21,-13.096 ; 21,-13.096 cw(c20.596,-12.693) 20.596,-13.264 ccw(c20.596,-12.693) 21,-13.096 ; 21,-11.896 ccw(c21.403,-12.3) 20.833,-12.3 cw(c21.403,-12.3) 21,-11.896 ; 21,-11.896 cw(c20.596,-11.493) 20.596,-12.064 ccw(c20.596,-11.493) 21,-11.896 ; 21,-10.696 ccw(c21.403,-11.1) 20.833,-11.1 cw(c21.403,-11.1) 21,-10.696 ; 21,-10.696 cw(c20.596,-10.293) 20.596,-10.864 ccw(c20.596,-10.293) 21,-10.696 ; 21,-9.496 ccw(c21.403,-9.9) 20.833,-9.9 cw(c21.403,-9.9) 21,-9.496 ; 21,-9.496 cw(c20.596,-9.093) 20.596,-9.664 ccw(c20.596,-9.093) 21,-9.496 ; 21,-8.296 ccw(c21.403,-8.7) 20.833,-8.7 cw(c21.403,-8.7) 21,-8.296 ; 21,-8.296 cw(c20.596,-7.893) 20.596,-8.464 ccw(c20.596,-7.893) 21,-8.296 ; 21,-7.096 ccw(c21.403,-7.5) 20.833,-7.5 cw(c21.403,-7.5) 21,-7.096 ; 21,-7.096 cw(c20.596,-6.693) 20.596,-7.264 ccw(c20.596,-6.693) 21,-7.096 ; 21,-5.896 ccw(c21.403,-6.3) 20.833,-6.3 cw(c21.403,-6.3) 21,-5.896 ; 21,-5.896 cw(c20.596,-5.493) 20.596,-6.064 ccw(c20.596,-5.493) 21,-5.896 ; 21,-4.696 ccw(c21.403,-5.1) 20.833,-5.1 cw(c21.403,-5.1) 21,-4.696 ; 21,-4.696 cw(c20.596,-4.293) 20.596,-4.864 ccw(c20.596,-4.293) 21,-4.696 ; 21,-3.496 ccw(c21.403,-3.9) 20.833,-3.9 cw(c21.403,-3.9) 21,-3.496 ; 21,-3.496 cw(c20.596,-3.093) 20.596,-3.664 ccw(c20.596,-3.093) 21,-3.496 ; 21,-2.296 ccw(c21.403,-2.7) 20.833,-2.7 cw(c21.403,-2.7) 21,-2.296 ; 21,-2.296 cw(c20.596,-1.893) 20.596,-2.464 ccw(c20.596,-1.893) 21,-2.296 ; 21,-1.096 ccw(c21.403,-1.5) 20.833,-1.5 cw(c21.403,-1.5) 21,-1.096 ; 21,-1.096 cw(c20.596,-0.693) 20.596,-1.264 ccw(c20.596,-0.693) 21,-1.096 ; 21,0.104 ccw(c21.403,-0.3) 20.833,-0.3 cw(c21.403,-0.3) 21,0.104 ; 21,0.104 cw(c20.596,0.507) 20.596,-0.064 ccw(c20.596,0.507) 21,0.104 ; 21,1.304 ccw(c21.403,0.9) 20.833,0.9 cw(c21.403,0.9) 21,1.304 ; 21,1.304 cw(c20.596,1.707) 20.596,1.136 ccw(c20.596,1.707) 21,1.304 ; 21,2.504 ccw(c21.403,2.1) 20.833,2.1 cw(c21.403,2.1) 21,2.504 ; 21,2.504 cw(c20.596,2.907) 20.596,2.336 ccw(c20.596,2.907) 21,2.504 ; 21,3.704 ccw(c21.403,3.3) 20.833,3.3 cw(c21.403,3.3) 21,3.704 ; 21,3.704 cw(c20.596,4.107) 20.596,3.536 ccw(c20.596,4.107) 21,3.704 ; 21,4.904 ccw(c21.403,4.5) 20.833,4.5 cw(c21.403,4.5) 21,4.904 ; 21,4.904 cw(c20.596,5.307) 20.596,4.736 ccw(c20.596,5.307) 21,4.904 ; 21,6.104 ccw(c21.403,5.7) 20.833,5.7 cw(c21.403,5.7) 21,6.104 ; 21,6.104 cw(c20.596,6.507) 20.596,5.936 ccw(c20.596,6.507) 21,6.104 ; 21,7.304 ccw(c21.403,6.9) 20.833,6.9 cw(c21.403,6.9) 21,7.304 ; 21,7.304 cw(c20.596,7.707) 20.596,7.136 ccw(c20.596,7.707) 21,7.304 ; 21,8.504 ccw(c21.403,8.1) 20.833,8.1 cw(c21.403,8.1) 21,8.504 ; 21,8.504 cw(c20.596,8.907) 20.596,8.336 ccw(c20.596,8.907) 21,8.504 ; 21,9.704 ccw(c21.403,9.3) 20.833,9.3 cw(c21.403,9.3) 21,9.704 ; 21,9.704 cw(c20.596,10.107) 20.596,9.536 ccw(c20.596,10.107) 21,9.704 ; 21,10.904 ccw(c21.403,10.5) 20.833,10.5 cw(c21.403,10.5) 21,10.904 ; 21,10.904 cw(c20.596,11.307) 20.596,10.736 ccw(c20.596,11.307) 21,10.904 ; 21,12.104 ccw(c21.403,11.7) 20.833,11.7 cw(c21.403,11.7) 21,12.104 ; 21,12.104 cw(c20.596,12.507) 20.596,11.936 ccw(c20.596,12.507) 21,12.104 ; 21,13.304 ccw(c21.403,12.9) 20.833,12.9 cw(c21.403,12.9) 21,13.304 ; 21,13.304 cw(c20.596,13.707) 20.596,13.136 ccw(c20.596,13.707) 21,13.304 ; 21,14.504 ccw(c21.403,14.1) 20.833,14.1 cw(c21.403,14.1) 21,14.504 ; 21,14.504 cw(c20.596,14.907) 20.596,14.336 ccw(c20.596,14.907) 21,14.504 ; 21.62,-14.1 ccw(c21.62,-13.77) 21.853,-14.003 cw(c21.62,-13.77) 21.62,-14.1 ; 21.62,-14.1 cw(c21.62,-14.43) 21.853,-14.197 ccw(c21.62,-14.43) 21.62,-14.1 ; v1@21.62,-13.5 ccw(c21.62,-13.17) 21.853,-13.403 cw(c21.62,-13.17) v1@21.62,-13.5 ; v1@21.62,-13.5 cw(c21.62,-13.83) 21.853,-13.597 ccw(c21.62,-13.83) v1@21.62,-13.5 ; 21.62,-12.9 ccw(c21.62,-12.57) 21.853,-12.803 cw(c21.62,-12.57) 21.62,-12.9 ; 21.62,-12.9 cw(c21.62,-13.23) 21.853,-12.997 ccw(c21.62,-13.23) 21.62,-12.9 ; v1@21.62,-12.3 ccw(c21.62,-11.97) 21.853,-12.203 cw(c21.62,-11.97) v1@21.62,-12.3 ; v1@21.62,-12.3 cw(c21.62,-12.63) 21.853,-12.397 ccw(c21.62,-12.63) v1@21.62,-12.3 ; 21.62,-11.7 ccw(c21.62,-11.37) 21.853,-11.603 cw(c21.62,-11.37) 21.62,-11.7 ; 21.62,-11.7 cw(c21.62,-12.03) 21.853,-11.797 ccw(c21.62,-12.03) 21.62,-11.7 ; v1@21.62,-11.1 ccw(c21.62,-10.77) 21.853,-11.003 cw(c21.62,-10.77) v1@21.62,-11.1 ; v1@21.62,-11.1 cw(c21.62,-11.43) 21.853,-11.197 ccw(c21.62,-11.43) v1@21.62,-11.1 ; 21.62,-10.5 ccw(c21.62,-10.17) 21.853,-10.403 cw(c21.62,-10.17) 21.62,-10.5 ; 21.62,-10.5 cw(c21.62,-10.83) 21.853,-10.597 ccw(c21.62,-10.83) 21.62,-10.5 ; v1@21.62,-9.9 ccw(c21.62,-9.57) 21.853,-9.803 cw(c21.62,-9.57) v1@21.62,-9.9 ; v1@21.62,-9.9 cw(c21.62,-10.23) 21.853,-9.997 ccw(c21.62,-10.23) v1@21.62,-9.9 ; 21.62,-9.3 ccw(c21.62,-8.97) 21.853,-9.203 cw(c21.62,-8.97) 21.62,-9.3 ; 21.62,-9.3 cw(c21.62,-9.63) 21.853,-9.397 ccw(c21.62,-9.63) 21.62,-9.3 ; v1@21.62,-8.7 ccw(c21.62,-8.37) 21.853,-8.603 cw(c21.62,-8.37) v1@21.62,-8.7 ; v1@21.62,-8.7 cw(c21.62,-9.03) 21.853,-8.797 ccw(c21.62,-9.03) v1@21.62,-8.7 ; 21.62,-8.1 ccw(c21.62,-7.77) 21.853,-8.003 cw(c21.62,-7.77) 21.62,-8.1 ; 21.62,-8.1 cw(c21.62,-8.43) 21.853,-8.197 ccw(c21.62,-8.43) 21.62,-8.1 ; v1@21.62,-7.5 ccw(c21.62,-7.17) 21.853,-7.403 cw(c21.62,-7.17) v1@21.62,-7.5 ; v1@21.62,-7.5 cw(c21.62,-7.83) 21.853,-7.597 ccw(c21.62,-7.83) v1@21.62,-7.5 ; 21.62,-6.9 ccw(c21.62,-6.57) 21.853,-6.803 cw(c21.62,-6.57) 21.62,-6.9 ; 21.62,-6.9 cw(c21.62,-7.23) 21.853,-6.997 ccw(c21.62,-7.23) 21.62,-6.9 ; v1@21.62,-6.3 ccw(c21.62,-5.97) 21.853,-6.203 cw(c21.62,-5.97) v1@21.62,-6.3 ; v1@21.62,-6.3 cw(c21.62,-6.63) 21.853,-6.397 ccw(c21.62,-6.63) v1@21.62,-6.3 ; 21.62,-5.7 ccw(c21.62,-5.37) 21.853,-5.603 cw(c21.62,-5.37) 21.62,-5.7 ; 21.62,-5.7 cw(c21.62,-6.03) 21.853,-5.797 ccw(c21.62,-6.03) 21.62,-5.7 ; v1@21.62,-5.1 ccw(c21.62,-4.77) 21.853,-5.003 cw(c21.62,-4.77) v1@21.62,-5.1 ; v1@21.62,-5.1 cw(c21.62,-5.43) 21.853,-5.197 ccw(c21.62,-5.43) v1@21.62,-5.1 ; 21.62,-4.5 ccw(c21.62,-4.17) 21.853,-4.403 cw(c21.62,-4.17) 21.62,-4.5 ; 21.62,-4.5 cw(c21.62,-4.83) 21.853,-4.597 ccw(c21.62,-4.83) 21.62,-4.5 ; v1@21.62,-3.9 ccw(c21.62,-3.57) 21.853,-3.803 cw(c21.62,-3.57) v1@21.62,-3.9 ; v1@21.62,-3.9 cw(c21.62,-4.23) 21.853,-3.997 ccw(c21.62,-4.23) v1@21.62,-3.9 ; 21.62,-3.3 ccw(c21.62,-2.97) 21.853,-3.203 cw(c21.62,-2.97) 21.62,-3.3 ; 21.62,-3.3 cw(c21.62,-3.63) 21.853,-3.397 ccw(c21.62,-3.63) 21.62,-3.3 ; v1@21.62,-2.7 ccw(c21.62,-2.37) 21.853,-2.603 cw(c21.62,-2.37) v1@21.62,-2.7 ; v1@21.62,-2.7 cw(c21.62,-3.03) 21.853,-2.797 ccw(c21.62,-3.03) v1@21.62,-2.7 ; 21.62,-2.1 ccw(c21.62,-1.77) 21.853,-2.003 cw(c21.62,-1.77) 21.62,-2.1 ; 21.62,-2.1 cw(c21.62,-2.43) 21.853,-2.197 ccw(c21.62,-2.43) 21.62,-2.1 ; v1@21.62,-1.5 ccw(c21.62,-1.17) 21.853,-1.403 cw(c21.62,-1.17) v1@21.62,-1.5 ; v1@21.62,-1.5 cw(c21.62,-1.83) 21.853,-1.597 ccw(c21.62,-1.83) v1@21.62,-1.5 ; 21.62,-0.9 ccw(c21.62,-0.57) 21.853,-0.803 cw(c21.62,-0.57) 21.62,-0.9 ; 21.62,-0.9 cw(c21.62,-1.23) 21.853,-0.997 ccw(c21.62,-1.23) 21.62,-0.9 ; v1@21.62,-0.3 ccw(c21.62,0.03) 21.853,-0.203 cw(c21.62,0.03) v1@21.62,-0.3 ; v1@21.62,-0.3 cw(c21.62,-0.63) 21.853,-0.397 ccw(c21.62,-0.63) v1@21.62,-0.3 ; 21.62,0.3 ccw(c21.62,0.63) 21.853,0.397 cw(c21.62,0.63) 21.62,0.3 ; 21.62,0.3 cw(c21.62,-0.03) 21.853,0.203 ccw(c21.62,-0.03) 21.62,0.3 ; v1@21.62,0.9 ccw(c21.62,1.23) 21.853,0.997 cw(c21.62,1.23) v1@21.62,0.9 ; v1@21.62,0.9 cw(c21.62,0.57) 21.853,0.803 ccw(c21.62,0.57) v1@21.62,0.9 ; 21.62,1.5 ccw(c21.62,1.83) 21.853,1.597 cw(c21.62,1.83) 21.62,1.5 ; 21.62,1.5 cw(c21.62,1.17) 21.853,1.403 ccw(c21.62,1.17) 21.62,1.5 ; v1@21.62,2.1 ccw(c21.62,2.43) 21.853,2.197 cw(c21.62,2.43) v1@21.62,2.1 ; v1@21.62,2.1 cw(c21.62,1.77) 21.853,2.003 ccw(c21.62,1.77) v1@21.62,2.1 ; 21.62,2.7 ccw(c21.62,3.03) 21.853,2.797 cw(c21.62,3.03) 21.62,2.7 ; 21.62,2.7 cw(c21.62,2.37) 21.853,2.603 ccw(c21.62,2.37) 21.62,2.7 ; v1@21.62,3.3 ccw(c21.62,3.63) 21.853,3.397 cw(c21.62,3.63) v1@21.62,3.3 ; v1@21.62,3.3 cw(c21.62,2.97) 21.853,3.203 ccw(c21.62,2.97) v1@21.62,3.3 ; 21.62,3.9 ccw(c21.62,4.23) 21.853,3.997 cw(c21.62,4.23) 21.62,3.9 ; 21.62,3.9 cw(c21.62,3.57) 21.853,3.803 ccw(c21.62,3.57) 21.62,3.9 ; v1@21.62,4.5 ccw(c21.62,4.83) 21.853,4.597 cw(c21.62,4.83) v1@21.62,4.5 ; v1@21.62,4.5 cw(c21.62,4.17) 21.853,4.403 ccw(c21.62,4.17) v1@21.62,4.5 ; 21.62,5.1 ccw(c21.62,5.43) 21.853,5.197 cw(c21.62,5.43) 21.62,5.1 ; 21.62,5.1 cw(c21.62,4.77) 21.853,5.003 ccw(c21.62,4.77) 21.62,5.1 ; v1@21.62,5.7 ccw(c21.62,6.03) 21.853,5.797 cw(c21.62,6.03) v1@21.62,5.7 ; v1@21.62,5.7 cw(c21.62,5.37) 21.853,5.603 ccw(c21.62,5.37) v1@21.62,5.7 ; 21.62,6.3 ccw(c21.62,6.63) 21.853,6.397 cw(c21.62,6.63) 21.62,6.3 ; 21.62,6.3 cw(c21.62,5.97) 21.853,6.203 ccw(c21.62,5.97) 21.62,6.3 ; v1@21.62,6.9 ccw(c21.62,7.23) 21.853,6.997 cw(c21.62,7.23) v1@21.62,6.9 ; v1@21.62,6.9 cw(c21.62,6.57) 21.853,6.803 ccw(c21.62,6.57) v1@21.62,6.9 ; 21.62,7.5 ccw(c21.62,7.83) 21.853,7.597 cw(c21.62,7.83) 21.62,7.5 ; 21.62,7.5 cw(c21.62,7.17) 21.853,7.403 ccw(c21.62,7.17) 21.62,7.5 ; v1@21.62,8.1 ccw(c21.62,8.43) 21.853,8.197 cw(c21.62,8.43) v1@21.62,8.1 ; v1@21.62,8.1 cw(c21.62,7.77) 21.853,8.003 ccw(c21.62,7.77) v1@21.62,8.1 ; 21.62,8.7 ccw(c21.62,9.03) 21.853,8.797 cw(c21.62,9.03) 21.62,8.7 ; 21.62,8.7 cw(c21.62,8.37) 21.853,8.603 ccw(c21.62,8.37) 21.62,8.7 ; v1@21.62,9.3 ccw(c21.62,9.63) 21.853,9.397 cw(c21.62,9.63) v1@21.62,9.3 ; v1@21.62,9.3 cw(c21.62,8.97) 21.853,9.203 ccw(c21.62,8.97) v1@21.62,9.3 ; 21.62,9.9 ccw(c21.62,10.23) 21.853,9.997 cw(c21.62,10.23) 21.62,9.9 ; 21.62,9.9 cw(c21.62,9.57) 21.853,9.803 ccw(c21.62,9.57) 21.62,9.9 ; v1@21.62,10.5 ccw(c21.62,10.83) 21.853,10.597 cw(c21.62,10.83) v1@21.62,10.5 ; v1@21.62,10.5 cw(c21.62,10.17) 21.853,10.403 ccw(c21.62,10.17) v1@21.62,10.5 ; 21.62,11.1 ccw(c21.62,11.43) 21.853,11.197 cw(c21.62,11.43) 21.62,11.1 ; 21.62,11.1 cw(c21.62,10.77) 21.853,11.003 ccw(c21.62,10.77) 21.62,11.1 ; v1@21.62,11.7 ccw(c21.62,12.03) 21.853,11.797 cw(c21.62,12.03) v1@21.62,11.7 ; v1@21.62,11.7 cw(c21.62,11.37) 21.853,11.603 ccw(c21.62,11.37) v1@21.62,11.7 ; 21.62,12.3 ccw(c21.62,12.63) 21.853,12.397 cw(c21.62,12.63) 21.62,12.3 ; 21.62,12.3 cw(c21.62,11.97) 21.853,12.203 ccw(c21.62,11.97) 21.62,12.3 ; v1@21.62,12.9 ccw(c21.62,13.23) 21.853,12.997 cw(c21.62,13.23) v1@21.62,12.9 ; v1@21.62,12.9 cw(c21.62,12.57) 21.853,12.803 ccw(c21.62,12.57) v1@21.62,12.9 ; 21.62,13.5 ccw(c21.62,13.83) 21.853,13.597 cw(c21.62,13.83) 21.62,13.5 ; 21.62,13.5 cw(c21.62,13.17) 21.853,13.403 ccw(c21.62,13.17) 21.62,13.5 ; v1@21.62,14.1 ccw(c21.62,14.43) 21.853,14.197 cw(c21.62,14.43) v1@21.62,14.1 ; v1@21.62,14.1 cw(c21.62,13.77) 21.853,14.003 ccw(c21.62,13.77) v1@21.62,14.1 ; 21.62,14.7 ccw(c21.62,15.03) 21.853,14.797 cw(c21.62,15.03) 21.62,14.7 ; 21.62,14.7 cw(c21.62,14.37) 21.853,14.603 ccw(c21.62,14.37) 21.62,14.7 ; P2-1.96@21.994,-13.5 ccw(c21.994,-14.071) 21.59,-13.667 cw(c21.994,-14.071) P2-1.96@21.994,-13.5 ; P2-1.96@21.994,-13.5 cw(c21.994,-12.929) 21.59,-13.333 ccw(c21.994,-12.929) P2-1.96@21.994,-13.5 ; P2-1.92@21.994,-12.3 ccw(c21.994,-12.871) 21.59,-12.467 cw(c21.994,-12.871) P2-1.92@21.994,-12.3 ; P2-1.92@21.994,-12.3 cw(c21.994,-11.729) 21.59,-12.133 ccw(c21.994,-11.729) P2-1.92@21.994,-12.3 ; P2-1.88@21.994,-11.1 ccw(c21.994,-11.671) 21.59,-11.267 cw(c21.994,-11.671) P2-1.88@21.994,-11.1 ; P2-1.88@21.994,-11.1 cw(c21.994,-10.529) 21.59,-10.933 ccw(c21.994,-10.529) P2-1.88@21.994,-11.1 ; P2-1.84@21.994,-9.9 ccw(c21.994,-10.471) 21.59,-10.067 cw(c21.994,-10.471) P2-1.84@21.994,-9.9 ; P2-1.84@21.994,-9.9 cw(c21.994,-9.329) 21.59,-9.733 ccw(c21.994,-9.329) P2-1.84@21.994,-9.9 ; P2-1.80@21.994,-8.7 ccw(c21.994,-9.271) 21.59,-8.867 cw(c21.994,-9.271) P2-1.80@21.994,-8.7 ; P2-1.80@21.994,-8.7 cw(c21.994,-8.129) 21.59,-8.533 ccw(c21.994,-8.129) P2-1.80@21.994,-8.7 ; P2-1.76@21.994,-7.5 ccw(c21.994,-8.071) 21.59,-7.667 cw(c21.994,-8.071) P2-1.76@21.994,-7.5 ; P2-1.76@21.994,-7.5 cw(c21.994,-6.929) 21.59,-7.333 ccw(c21.994,-6.929) P2-1.76@21.994,-7.5 ; P2-1.72@21.994,-6.3 ccw(c21.994,-6.871) 21.59,-6.467 cw(c21.994,-6.871) P2-1.72@21.994,-6.3 ; P2-1.72@21.994,-6.3 cw(c21.994,-5.729) 21.59,-6.133 ccw(c21.994,-5.729) P2-1.72@21.994,-6.3 ; P2-1.68@21.994,-5.1 ccw(c21.994,-5.671) 21.59,-5.267 cw(c21.994,-5.671) P2-1.68@21.994,-5.1 ; P2-1.68@21.994,-5.1 cw(c21.994,-4.529) 21.59,-4.933 ccw(c21.994,-4.529) P2-1.68@21.994,-5.1 ; P2-1.64@21.994,-3.9 ccw(c21.994,-4.471) 21.59,-4.067 cw(c21.994,-4.471) P2-1.64@21.994,-3.9 ; P2-1.64@21.994,-3.9 cw(c21.994,-3.329) 21.59,-3.733 ccw(c21.994,-3.329) P2-1.64@21.994,-3.9 ; P2-1.60@21.994,-2.7 ccw(c21.994,-3.271) 21.59,-2.867 cw(c21.994,-3.271) P2-1.60@21.994,-2.7 ; P2-1.60@21.994,-2.7 cw(c21.994,-2.129) 21.59,-2.533 ccw(c21.994,-2.129) P2-1.60@21.994,-2.7 ; P2-1.56@21.994,-1.5 ccw(c21.994,-2.071) 21.59,-1.667 cw(c21.994,-2.071) P2-1.56@21.994,-1.5 ; P2-1.56@21.994,-1.5 cw(c21.994,-0.929) 21.59,-1.333 ccw(c21.994,-0.929) P2-1.56@21.994,-1.5 ; P2-1.52@21.994,-0.3 ccw(c21.994,-0.871) 21.59,-0.467 cw(c21.994,-0.871) P2-1.52@21.994,-0.3 ; P2-1.52@21.994,-0.3 cw(c21.994,0.271) 21.59,-0.133 ccw(c21.994,0.271) P2-1.52@21.994,-0.3 ; P2-1.48@21.994,0.9 ccw(c21.994,0.329) 21.59,0.733 cw(c21.994,0.329) P2-1.48@21.994,0.9 ; P2-1.48@21.994,0.9 cw(c21.994,1.471) 21.59,1.067 ccw(c21.994,1.471) P2-1.48@21.994,0.9 ; P2-1.44@21.994,2.1 ccw(c21.994,1.529) 21.59,1.933 cw(c21.994,1.529) P2-1.44@21.994,2.1 ; P2-1.44@21.994,2.1 cw(c21.994,2.671) 21.59,2.267 ccw(c21.994,2.671) P2-1.44@21.994,2.1 ; P2-1.40@21.994,3.3 ccw(c21.994,2.729) 21.59,3.133 cw(c21.994,2.729) P2-1.40@21.994,3.3 ; P2-1.40@21.994,3.3 cw(c21.994,3.871) 21.59,3.467 ccw(c21.994,3.871) P2-1.40@21.994,3.3 ; P2-1.36@21.994,4.5 ccw(c21.994,3.929) 21.59,4.333 cw(c21.994,3.929) P2-1.36@21.994,4.5 ; P2-1.36@21.994,4.5 cw(c21.994,5.071) 21.59,4.667 ccw(c21.994,5.071) P2-1.36@21.994,4.5 ; P2-1.32@21.994,5.7 ccw(c21.994,5.129) 21.59,5.533 cw(c21.994,5.129) P2-1.32@21.994,5.7 ; P2-1.32@21.994,5.7 cw(c21.994,6.271) 21.59,5.867 ccw(c21.994,6.271) P2-1.32@21.994,5.7 ; P2-1.28@21.994,6.9 ccw(c21.994,6.329) 21.59,6.733 cw(c21.994,6.329) P2-1.28@21.994,6.9 ; P2-1.28@21.994,6.9 cw(c21.994,7.471) 21.59,7.067 ccw(c21.994,7.471) P2-1.28@21.994,6.9 ; P2-1.24@21.994,8.1 ccw(c21.994,7.529) 21.59,7.933 cw(c21.994,7.529) P2-1.24@21.994,8.1 ; P2-1.24@21.994,8.1 cw(c21.994,8.671) 21.59,8.267 ccw(c21.994,8.671) P2-1.24@21.994,8.1 ; P2-1.20@21.994,9.3 ccw(c21.994,8.729) 21.59,9.133 cw(c21.994,8.729) P2-1.20@21.994,9.3 ; P2-1.20@21.994,9.3 cw(c21.994,9.871) 21.59,9.467 ccw(c21.994,9.871) P2-1.20@21.994,9.3 ; P2-1.16@21.994,10.5 ccw(c21.994,9.929) 21.59,10.333 cw(c21.994,9.929) P2-1.16@21.994,10.5 ; P2-1.16@21.994,10.5 cw(c21.994,11.071) 21.59,10.667 ccw(c21.994,11.071) P2-1.16@21.994,10.5 ; P2-1.12@21.994,11.7 ccw(c21.994,11.129) 21.59,11.533 cw(c21.994,11.129) P2-1.12@21.994,11.7 ; P2-1.12@21.994,11.7 cw(c21.994,12.271) 21.59,11.867 ccw(c21.994,12.271) P2-1.12@21.994,11.7 ; P2-1.8@21.994,12.9 ccw(c21.994,12.329) 21.59,12.733 cw(c21.994,12.329) P2-1.8@21.994,12.9 ; P2-1.8@21.994,12.9 cw(c21.994,13.471) 21.59,13.067 ccw(c21.994,13.471) P2-1.8@21.994,12.9 ; P2-1.4@21.994,14.1 ccw(c21.994,13.529) 21.59,13.933 cw(c21.994,13.529) P2-1.4@21.994,14.1 ; P2-1.4@21.994,14.1 cw(c21.994,14.671) 21.59,14.267 ccw(c21.994,14.671) P2-1.4@21.994,14.1
  Component Side w0.2: D2.2@-14,18 -13.975,17.975 -13.95,17.95 D3.2@-12,17.95 D4.2@-10,17.95 v1(-8.8,17.95) ; v1@2.4,-14.1 2.4,-13.6 C54.2@3.4,-12.6 ; D2.2@-13.478,17.95 ccw(c-13.478,19.278) -12.539,18.339 cw(c-13.478,19.278) D2.2@-13.478,17.95 ; D2.2@-13.478,17.95 cw(c-13.478,16.622) -12.539,17.561 ccw(c-13.478,16.622) D2.2@-13.478,17.95 ; -13.005,17.95 ccw(c-13.005,17.105) -13.603,17.702 cw(c-13.005,17.105) -13.005,17.95 ; -13.005,17.95 cw(c-13.005,18.795) -13.603,18.197 ccw(c-13.005,18.795) -13.005,17.95 ; -12.995,17.95 ccw(c-12.995,18.795) -12.397,18.197 cw(c-12.995,18.795) -12.995,17.95 ; -12.995,17.95 cw(c-12.995,17.105) -12.397,17.702 ccw(c-12.995,17.105) -12.995,17.95 ; D3.2@-12.522,17.95 ccw(c-12.522,16.622) -13.461,17.561 cw(c-12.522,16.622) D3.2@-12.522,17.95 ; D3.2@-12.522,17.95 cw(c-12.522,19.278) -13.461,18.339 ccw(c-12.522,19.278) D3.2@-12.522,17.95 ; D3.2@-11.478,17.95 ccw(c-11.478,19.278) -10.539,18.339 cw(c-11.478,19.278) D3.2@-11.478,17.95 ; D3.2@-11.478,17.95 cw(c-11.478,16.622) -10.539,17.561 ccw(c-11.478,16.622) D3.2@-11.478,17.95 ; -11.005,17.95 ccw(c-11.005,17.105) -11.603,17.702 cw(c-11.005,17.105) -11.005,17.95 ; -11.005,17.95 cw(c-11.005,18.795) -11.603,18.197 ccw(c-11.005,18.795) -11.005,17.95 ; -10.995,17.95 ccw(c-10.995,18.795) -10.397,18.197 cw(c-10.995,18.795) -10.995,17.95 ; -10.995,17.95 cw(c-10.995,17.105) -10.397,17.702 ccw(c-10.995,17.105) -10.995,17.95 ; D4.2@-10.522,17.95 ccw(c-10.522,16.622) -11.461,17.561 cw(c-10.522,16.622) D4.2@-10.522,17.95 ; D4.2@-10.522,17.95 cw(c-10.522,19.278) -11.461,18.339 ccw(c-10.522,19.278) D4.2@-10.522,17.95 ; D4.2@-9.283,17.95 ccw(c-9.283,18.433) -8.941,18.091 cw(c-9.283,18.433) D4.2@-9.283,17.95 ; D4.2@-9.283,17.95 cw(c-9.283,17.467) -8.941,17.809 ccw(c-9.283,17.467) D4.2@-9.283,17.95 ; -9.182,17.95 ccw(c-9.182,17.487) -9.562,17.751 cw(c-9.182,17.487) -9.182,17.95 ; -9.182,17.95 cw(c-9.182,18.413) -9.562,18.149 ccw(c-9.182,18.413) -9.182,17.95 ; v1(-8.8,17.95) ccw(c-8.8,17.223) -9.398,17.637 cw(c-8.8,17.223) v1(-8.8,17.95) ; v1(-8.8,17.95) cw(c-8.8,18.677) -9.398,18.263 ccw(c-8.8,18.677) v1(-8.8,17.95) ; 2.4,-13.717 ccw(c2.883,-13.717) 2.541,-14.059 cw(c2.883,-13.717) 2.4,-13.717 ; 2.4,-13.717 cw(c1.917,-13.717) 2.259,-14.059 ccw(c1.917,-13.717) 2.4,-13.717 ; 2.346,-13.654 ccw(c1.493,-12.8) 2.7,-12.8 cw(c1.493,-12.8) 2.346,-13.654 ; 2.538,-13.462 cw(c3.052,-13.976) 3.258,-13.279 ccw(c3.052,-13.976) 2.538,-13.462 ; C54.2@2.688,-13.312 ccw(c2.176,-12.8) 2.9,-12.8 cw(c2.176,-12.8) C54.2@2.688,-13.312
  Component Side w0.4: v1(-10,-10) U1.Y1@-9.5,-9.5 ; v1(-10,1) U1.K1@-9.5,0.5 ; v1(-10,10) U1.A1@-9.5,9.5 ; v1(-9,-4) U1.P2@-8.5,-3.5 ; v1(-9,4) U1.G2@-8.5,3.5 ; v1(-8,-9) U1.W3@-7.5,-8.5 ; v1(-8,-8) U1.V3@-7.5,-7.5 ; v1(-8,8) U1.C3@-7.5,7.5 ; v1(-7,-1) U1.L4@-6.5,-0.5 ; v1(-6,6) U1.E5@-5.5,5.5 ; v1(-5,-5) U1.R6@-4.5,-4.5 ; v1(-5,9) U1.B6@-4.5,8.5 ; v1(-4,-9) U1.W7@-3.5,-8.5 ; v1(-3,-3) U1.N8@-2.5,-2.5 ; v1(-3,3) U1.H8@-2.5,2.5 ; v1(-2,-5) U1.R9@-1.5,-4.5 ; v1(-2,2) U1.J9@-1.5,1.5 ; v1(-2,7) U1.D9@-1.5,6.5 ; v1(-1,-10) U1.Y10@-0.5,-9.5 ; v1(-1,-2) U1.M10@-0.5,-1.5 ; v1(-1,1) U1.K10@-0.5,0.5 ; U1.N11@0.5,-2.5 v1(1,-3) ; U1.L11@0.5,-0.5 v1(1,-1) ; U1.J11@0.5,1.5 v1(1,2) ; U1.A11@0.5,9.5 v1(1,10) ; U1.U12@1.5,-6.5 v1(2,-7) ; U1.M12@1.5,-1.5 v1(2,-2) ; U1.K12@1.5,0.5 v1(2,1) ; U1.E12@1.5,5.5 v1(2,6) ; U1.N13@2.5,-2.5 v1(3,-3) ; U1.H13@2.5,2.5 v1(3,3) ; U1.B14@3.5,8.5 v1(4,9) ; U1.W15@4.5,-8.5 v1(5,-9) ; U1.F15@4.5,4.5 v1(5,5) ; U1.T16@5.5,-5.5 v1(6,-6) ; U1.K17@6.5,0.5 v1(7,1) ; U1.V18@7.5,-7.5 v1(8,-8) ; U1.C18@7.5,7.5 v1(8,8) ; U1.P19@8.5,-3.5 v1(9,-4) ; U1.G19@8.5,3.5 v1(9,4) ; U1.Y20@9.5,-9.5 v1(10,-10) ; U1.L20@9.5,-0.5 v1(10,-1) ; U1.A20@9.5,9.5 v1(10,10)